# EAGLE board circle_color_led (EAGLE 7.4.0)
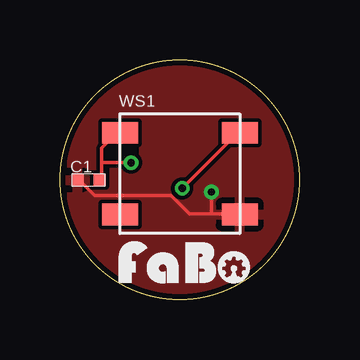
[diagram p0: board, top side]
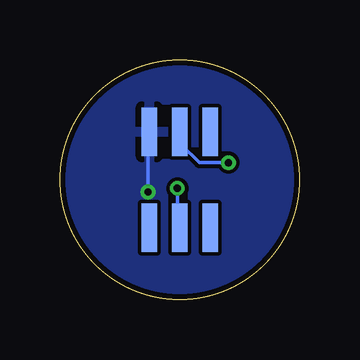
[diagram p1: board, bottom side, seen from below]

Size 10 x 10 mm. Coordinates in mm from the lower left corner, seen from the top.
Copper layers (1*16): Top 0.035mm / dielectric 1.5mm / Bottom 0.035mm
Design rules "SeeedStudio_2layer_DRU_no_angle_20140221": minimum track width 6mil, minimum drill 12mil, track to track 6mil, track to pad 6mil, pad to pad 6mil, via to via 6mil, smd to smd 0mil, copper to edge 10mil, drill to drill 10mil, minimum pad ring 10mil, minimum via ring 6mil, stop-mask expansion 2mil, vias tented up to drill 100mil, thermal gap 10mil

## Footprints (pad centres in the part's own frame; a part is rotated, then mirrored left to right if it is on the bottom)
0402 = smd 0.5 x 0.5: P$1 -0.46,0; P$2 0.46,0
FABO-NANO = smd 0.635 x 2.032 bottom: 0 -1.27,2; 1 1.27,-2; 2 0,-2; 3 -1.27,-2; GND 1.27,2; VCC 0,2
WS2818B = smd 1.5 x 0.9: 1 -2.5,1.7; 2 -2.5,-1.7; 3 2.5,-1.7; 4 2.5,1.7

## Placement (x,y rotation side)
C1  0.1uf  [0402]  1.19,5 0 top
U$2  FABO-NANO  [FABO-NANO]  5,5 0 top
U$3  [LOGO_FABO_S]  5.25,0.68 0 top
WS1  [WS2818B]  5,5.25 0 top

## Library data of the parts
C1 = FaBo-Capacitor
U$2 = FaBo-Template
U$3 = FaBo
WS1 = FaBo-LED

## Nets
+5V: C1.P$2 U$2.VCC WS1.1
DI_1: U$2.2 WS1.4
DO_1: WS1.2
GND: C1.P$1 U$2.GND WS1.3

## Tracks (layer width: path | path; a pad name or v marks a point on that pad's centre or on a via)
+5V  (via drill 0.3)
  Top 0.152: 1.75,5.71 1.75,6.32 2.36,6.93 WS1.1 | 1.75,5.71 1.75,5.1 C1.P$2 | v2.97,5.71 1.75,5.71
  Bottom 0.152: v2.97,5.71 4.19,5.71 4.95,6.47 4.95,6.93 U$2.VCC
DI_1  (via drill 0.3)
  Top 0.152: v5.1,4.64 7.39,6.93 WS1.4
  Bottom 0.152: v5.1,4.64 5.1,3.12 U$2.2
GND  (via drill 0.3)
  Top 0.152: 6.32,3.58 7.39,3.58 WS1.3 | 6.32,3.58 5.41,3.58 4.64,4.34 1.44,4.34 0.83,4.95 C1.P$1 | 6.32,3.58 v6.32,4.49
  Bottom 0.152: v6.32,4.49 6.32,6.93 U$2.GND
  pour Top: -0.08,-0.08 10.08,-0.08 10.08,10.08 -0.08,10.08
  pour Bottom: -0.08,-0.08 10.08,-0.08 10.08,10.08 -0.08,10.08